# Altium PCB PCB1.PcbDoc
Units mm, origin at the board's own origin, x right, y up, seen from the top; angles counter-clockwise.
Board outline 50 x 50 mm, 2 copper layers (Top Layer, Bottom Layer); 9 components, 6 nets, 36 pads, 4 vias.
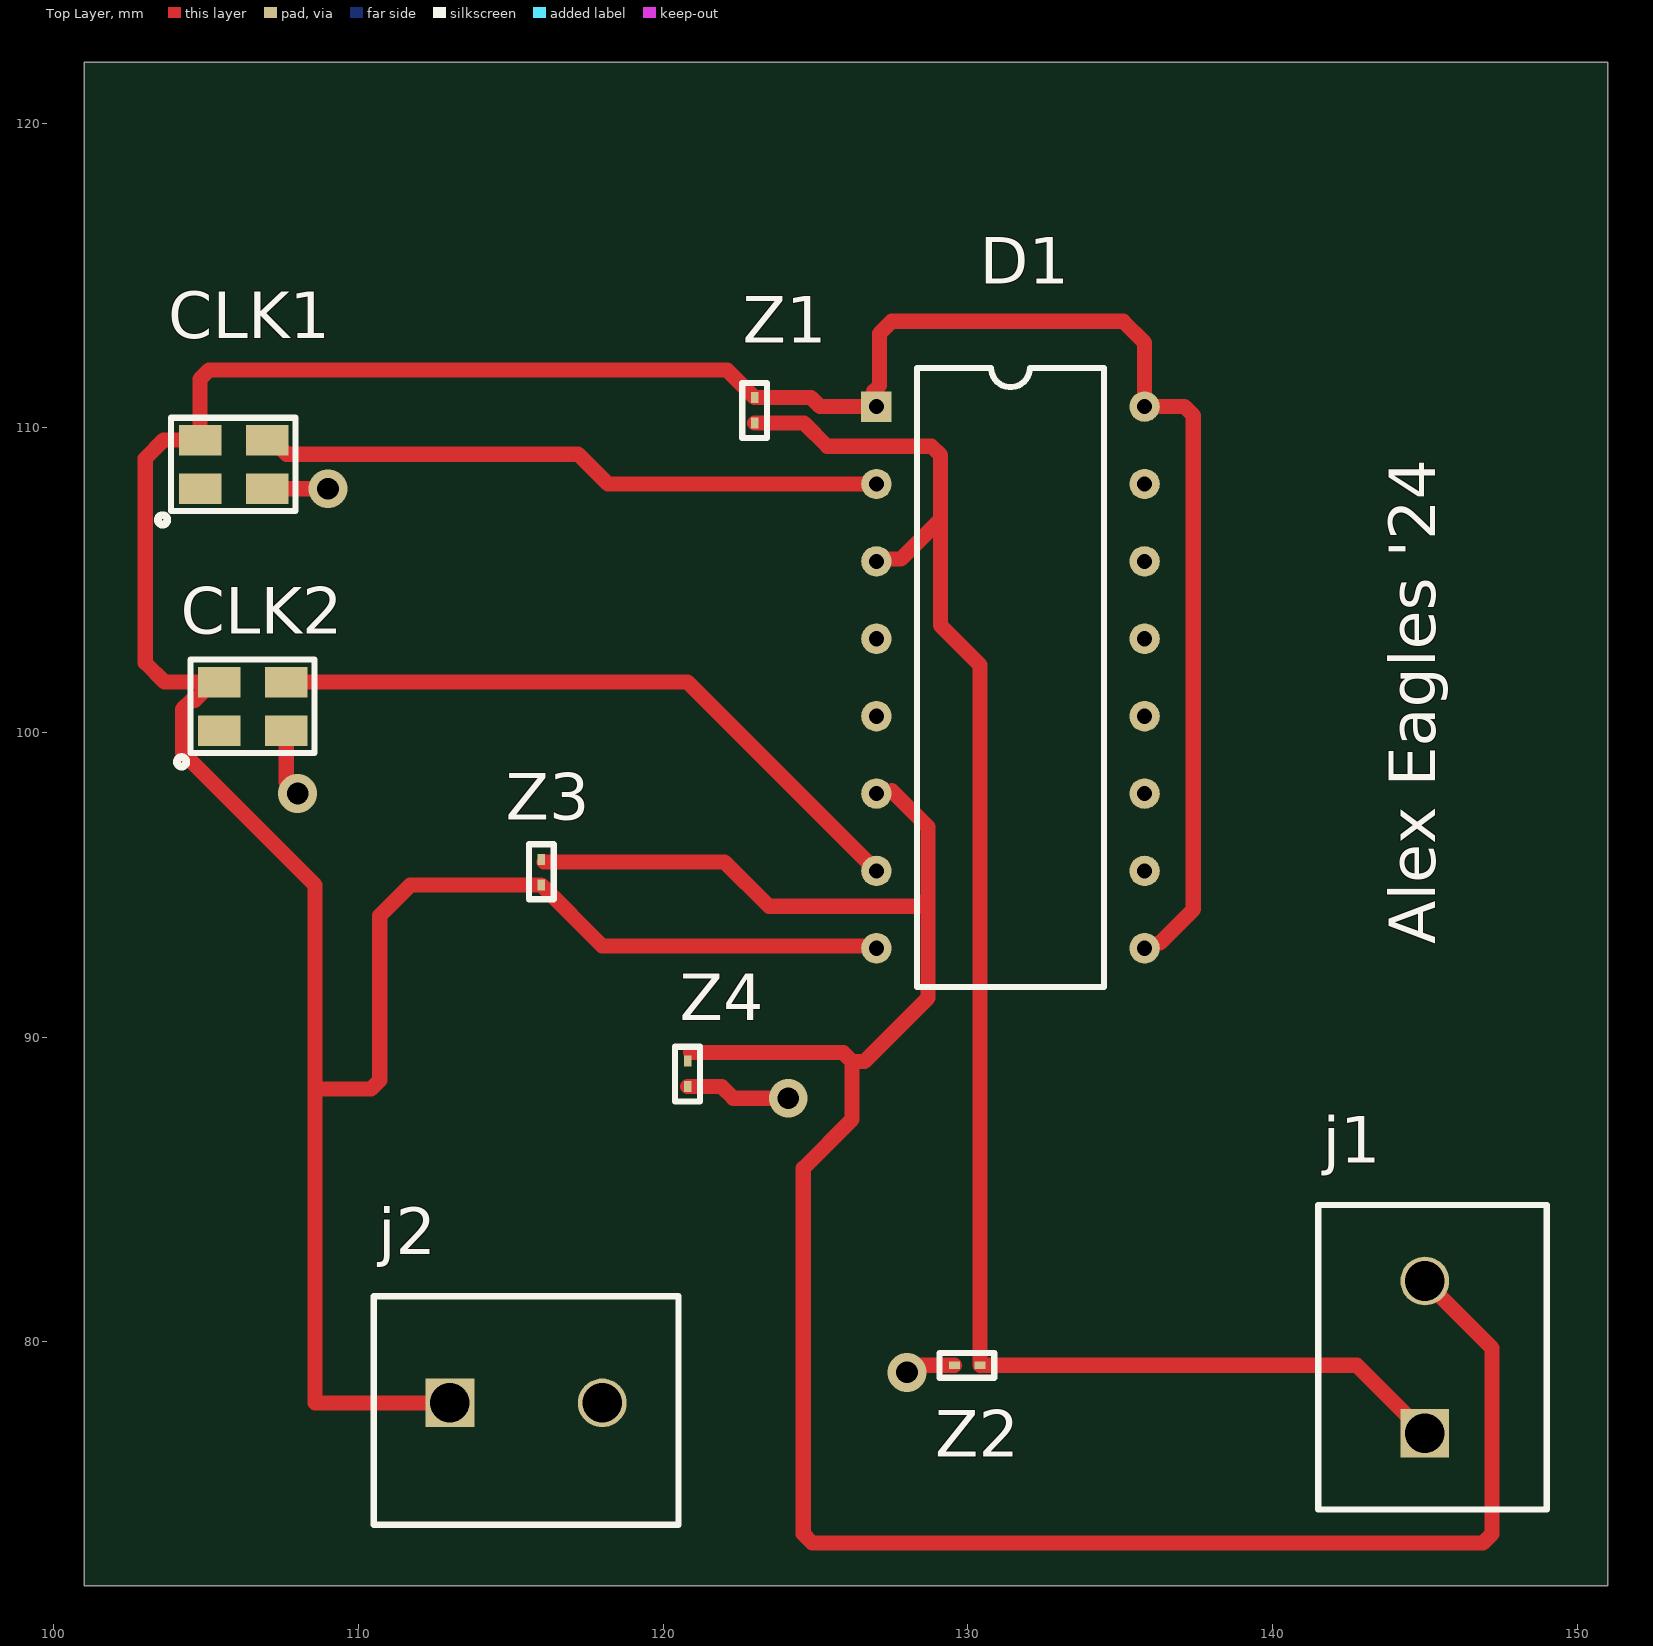
[diagram p0: Top Layer view]
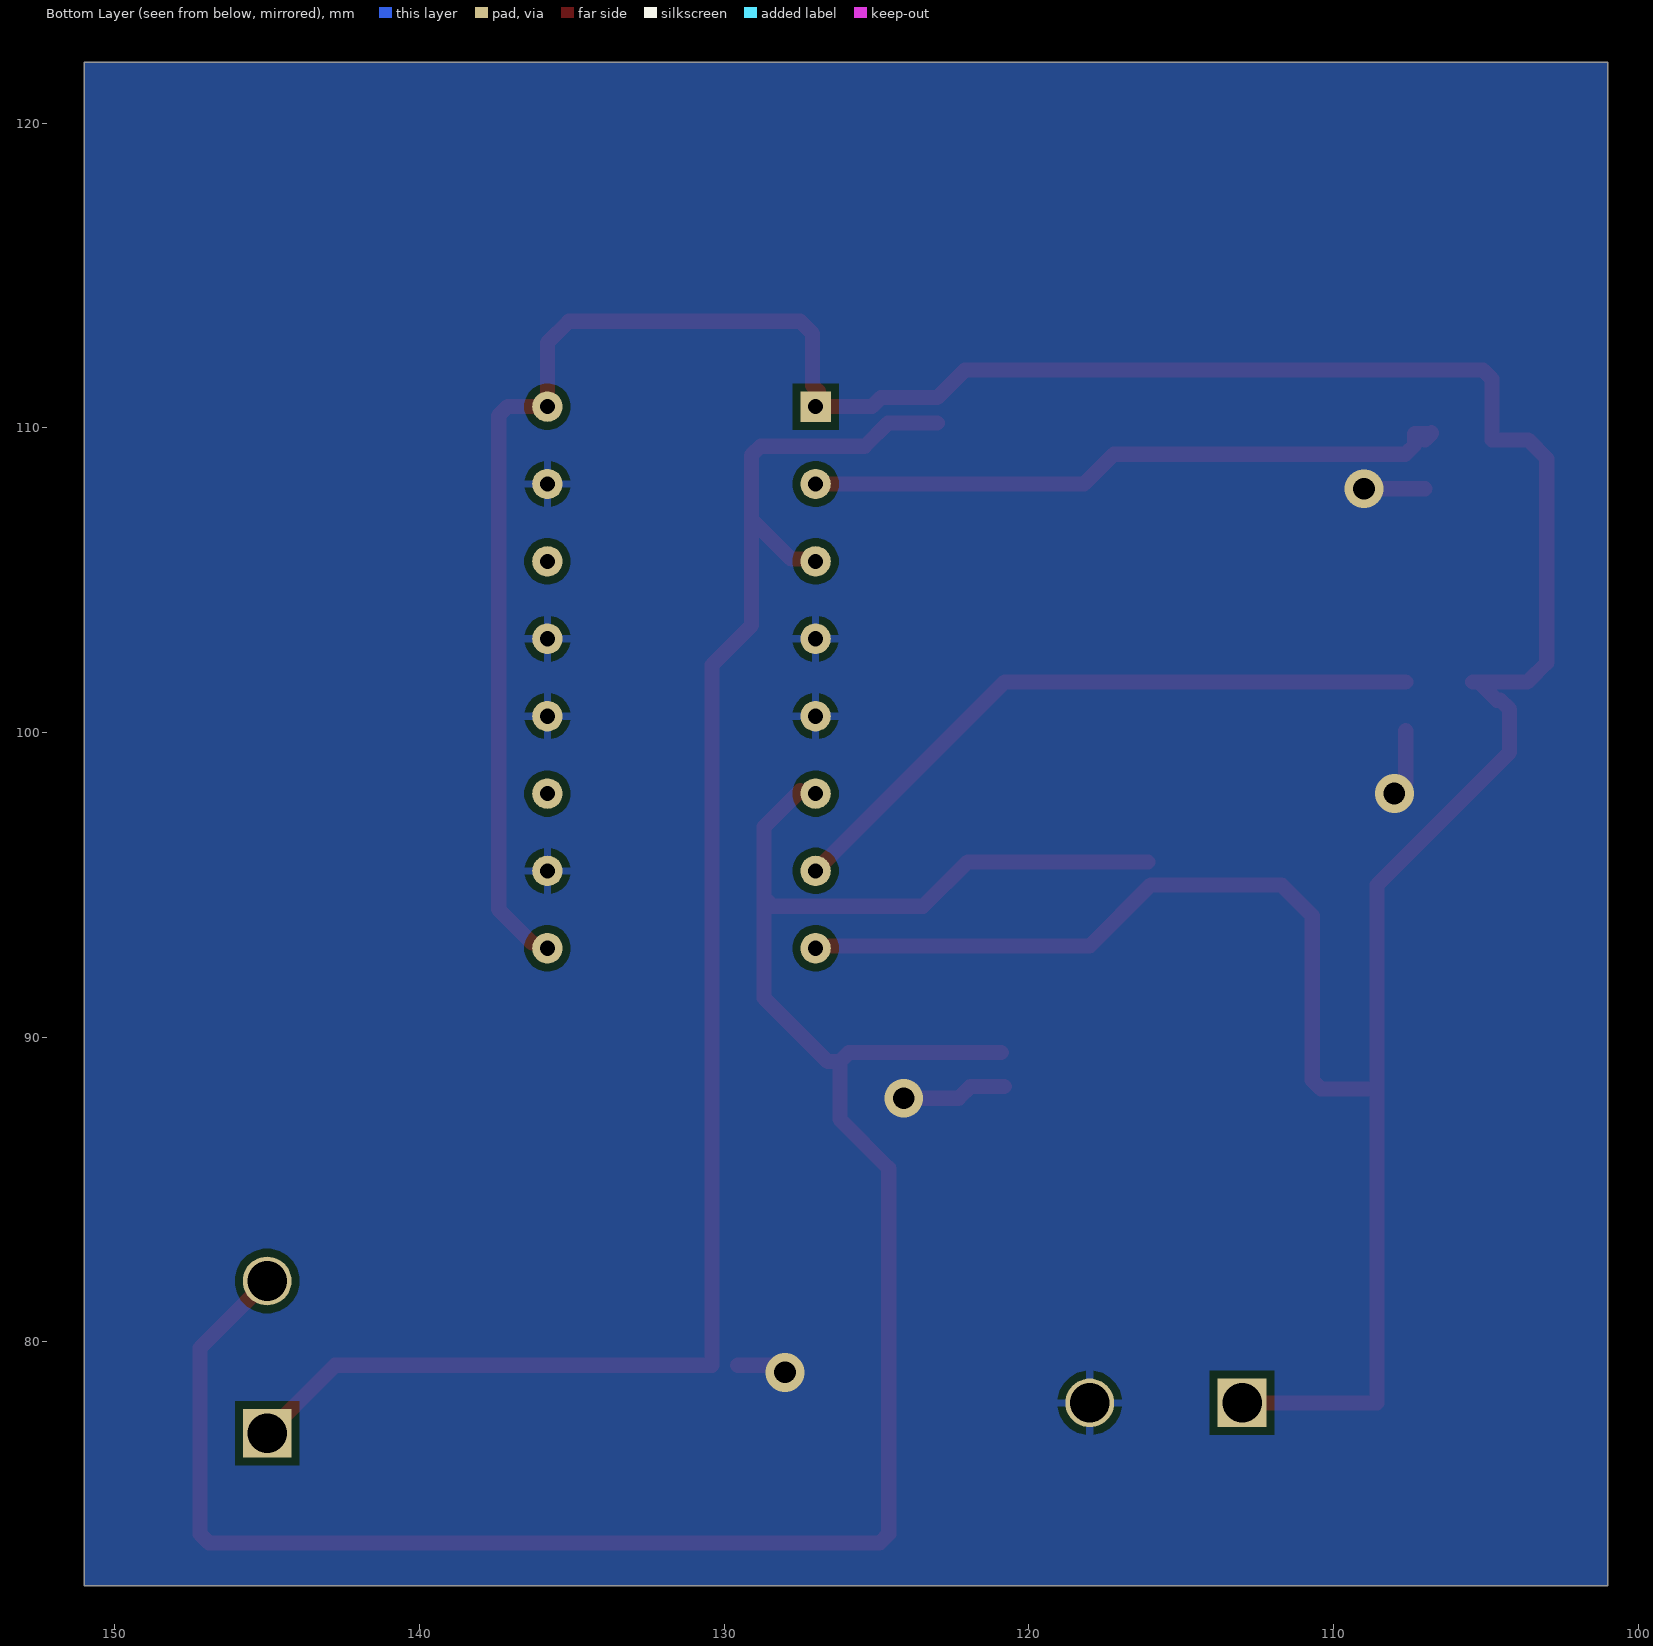
[diagram p1: Bottom Layer view, seen from below]
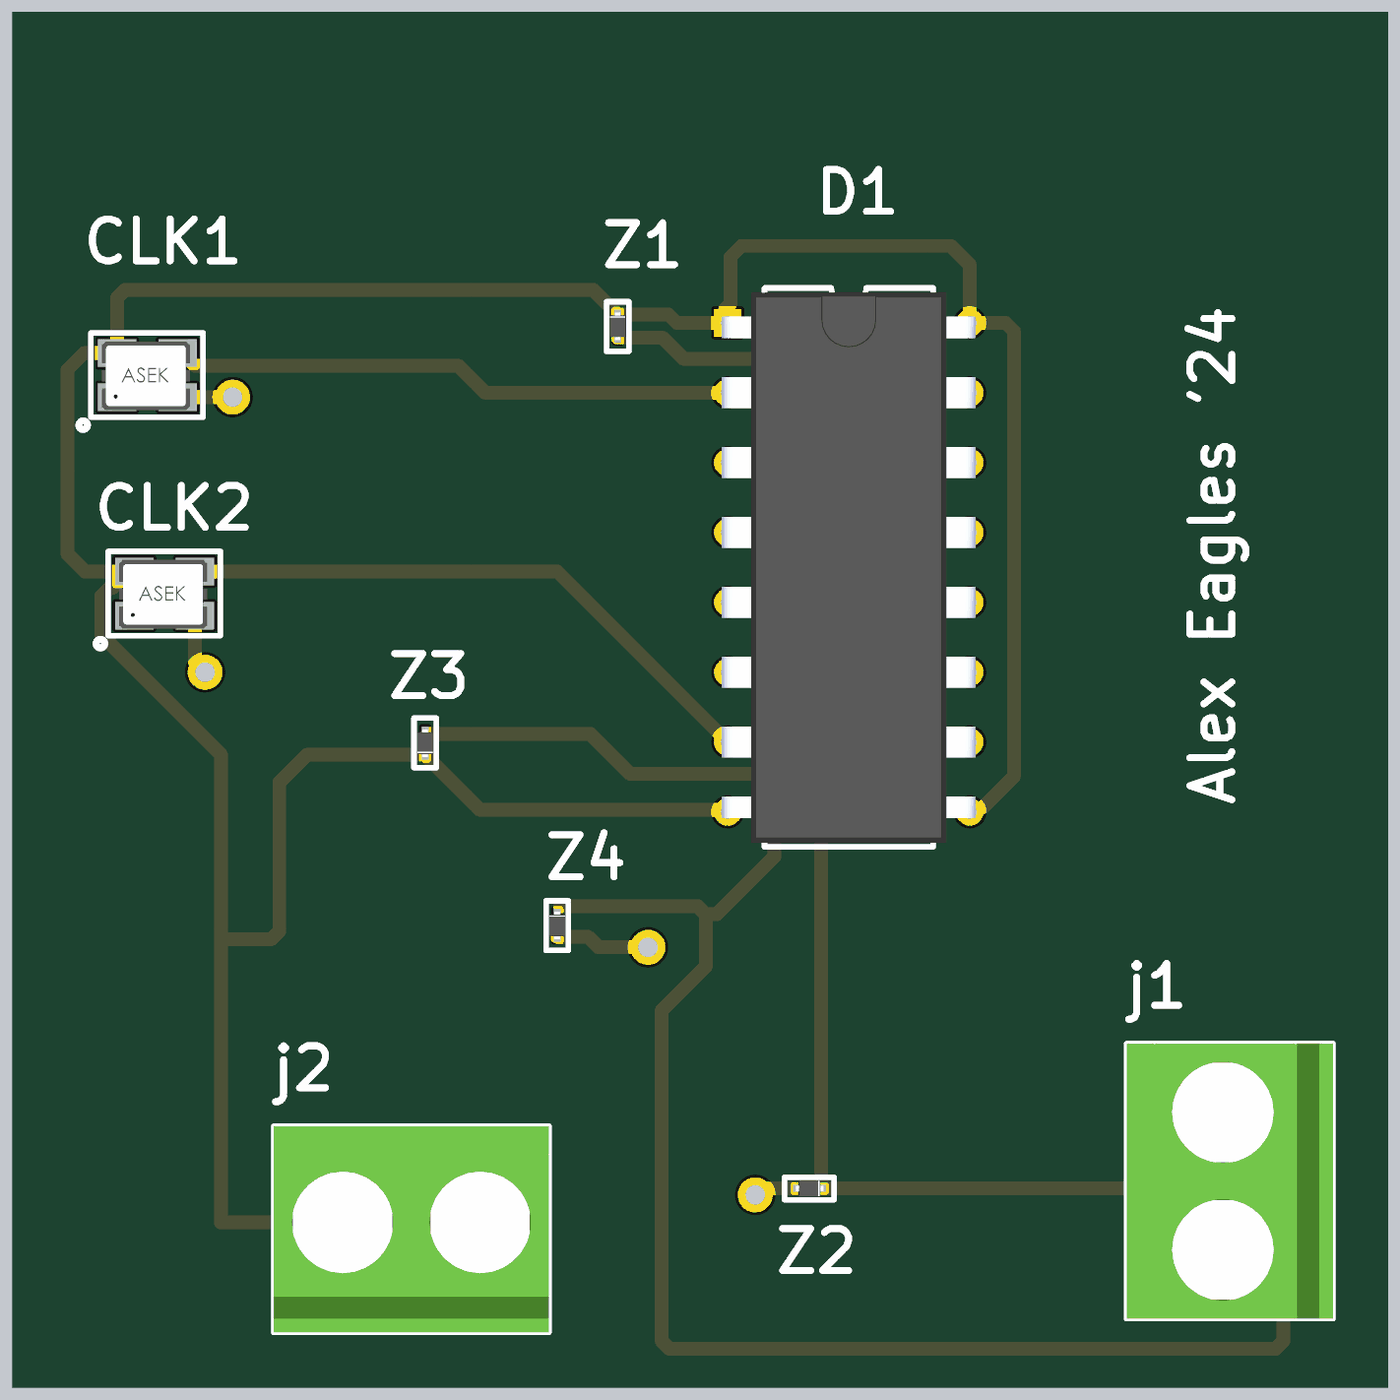
[diagram p2: 3D render of the assembled board from above, using the file's embedded part models]

## Layer stack, top to bottom
Top Solder: solder mask 0.0102, Solder Resist, Dk 3.5
Top Layer: signal copper 0.0356
Dielectric 1: dielectric 0.32, FR-4, Dk 4.8
Bottom Layer: signal copper 0.0356
Bottom Solder: solder mask 0.0102, Solder Resist, Dk 3.5

## Board outline
101,122 151,122 151,72 101,72

## Design rules (kind name [scope] priority, off if disabled: settings)
Clearance [All] p1: gap=0.254 ignorepadtopadclearanceinfootprint=FALSE except(0: Arc-Hole Track-Hole SMDPad-Hole THPad-Hole Via-Hole Fill-Hole Poly-Hole Region-Hole Text-Hole)
PolygonConnect [All] p1: connectstyle=Relief reliefconductorwidth=0.254 reliefentries=4 polygonreliefangle="90 Angle" airgapwidth=0.254
RoutingVias [All] p1: holewidth=0.711 width=1.27 viastyle="Through Hole" minholewidth=0.711 minwidth=1.27 maxholewidth=0.711 maxwidth=1.27
SolderMaskExpansion [All] p1: expansion=0.102 istentingtop=FALSE
Width [All] p1: maxlimit=0.5 minlimit=0.5 preferedwidth=0.5 minimp=50.000000 maximp=50.000000 favimp=50.000000
30 further rules are at their usual default settings.

## Components (designator, comment, footprint, x,y, rotation, side; value= is the part's Value field where it differs from the comment)
CLK1 "crystal clock" "Crystal Oscillator" 104.339,109.927 r0 top
CLK2 "crystal clock" "Crystal Oscillator" 104.966,101.986 r0 top
D1 "L293D Driver" Driver 131.4,101.81 r0 top
j1 "terminal" TERMINAL 145,77 r90 top
j2 "terminal" TERMINAL 113,78 r0 top
Z1 "Zener" Zener 123,110.58 r270 top
Z2 "Zener" Zener 129.977,79.231 r180 top
Z3 "Zener" Zener 116,95.42 r90 top
Z4 "Zener" Zener 120.8,88.8 r270 top

## Footprints (in the part's own frame and the unit in brackets; to place one, negate y for a bottom-side part, rotate by r counter-clockwise, add the part's x,y. Pads: shape width x height; smd on the part's side, far side on the other; paste and mask are expansions set on the pad)
"Crystal Oscillator" [mm]
  rect 1.4x1 smd: 1(0.461,-1.927) 2(2.661,-1.927) 3(2.661,-0.327) 4(0.461,-0.327)
  silkscreen extent -0.93,-3.1 3.59,0.41, body extent -0.09,-2.4 3.11,0.1, height 1.2
Driver [mm]
  rect 1x1 hole 0.5: 1(-4.4,8.89)
  round 1 hole 0.5: 2(-4.4,6.35) 3(-4.4,3.81) 4(-4.4,1.27) 5(-4.4,-1.27) 6(-4.4,-3.81) 7(-4.4,-6.35) 8(-4.4,-8.89) 9(4.4,-8.89) 10(4.4,-6.35) 11(4.4,-3.81) 12(4.4,-1.27) 13(4.4,1.27) 14(4.4,3.81) 15(4.4,6.35) 16(4.4,8.89)
  silkscreen extent -3.07,-10.16 3.07,10.16, body extent -4.62,-10 4.62,10, height 5.1
TERMINAL [mm]
  rect 1.6x1.6 hole 1.3: 1(0,0)
  round 1.6 hole 1.3: 2(5,0)
  silkscreen extent -2.5,-4 7.5,3.5, body extent -2.5,-4 7.5,3.5, height 11.5
Zener [mm]
  rect 0.36x0.25 smd: 1(-0.42,0) 2(0.42,0)
  silkscreen extent -0.89,-0.41 0.91,0.41, body extent -0.5,-0.3 0.5,0.3, height 0.4

## Part data
CLK1 CLK2: library part "Crystal oscillator", "Oscillator XO 0.032768MHz ±25ppm 15pF 60% 3.3V 4-Pin SMD T/R", Manufacturer=Abracon, Manufacturer Part Number=ASEK-32.768KHZ-L-R-T, Supplier Part Number=815-ASEK-32.7K-LRT, Pricing="1=1.33, 10=1.04, 50=1.04, 100=0.986, 1000=0.787, 10000=0.696 (USD)", RoHS=No, Stock=5543, Supplier=Mouser
D1: "IC MTRDRV BIPLR 4.5-36V 16PWRDIP", Part Number=497-2936-5-ND, ComponentLink1Description=DigiKey, ComponentLink1URL=https://www.digikey.com/en/products/detail/stmicroelectronics/L293D/634700
j1 j2: "Barrier Strip Terminal Block", Manufacturer="Wurth Electronics", Manufacturer Part Number=691137710002, Supplier Part Number=1769908, Category="Terminal Blocks", ComponentLink1Description=https://datasheet.ciiva.com:443/pdfs/VipMasterIC/IC/MIDC/MIDC-S-A0005074262/MIDC-S-A0004711666-1.pdf?src-supplier=IHS+Markit, ComponentLink1URL=https://datasheet.ciiva.com:443/pdfs/VipMasterIC/IC/MIDC/MIDC-S-A0005074262/MIDC-S-A0004711666-1.pdf?src-supplier=IHS+Markit, ComponentLink2Description=https://katalog.we-online.de/em/datasheet/691137710002.pdf?src-supplier=Digikey, ComponentLink2URL=https://katalog.we-online.de/em/datasheet/691137710002.pdf?src-supplier=Digikey, Pricing="500=0.218, 1000=0.202, 2500=0.189 (GBP)", RoHS=No, RoHS Compliant=Yes, Stock=355, Supplier=Rs
Z1 Z2 Z3 Z4: "TVS DIODE 5VWM SOD923", Part Number=ESD9B5.0ST5GOSDKR-ND, ComponentLink1Description=DigiKey, ComponentLink1URL=https://www.digikey.com/en/products/detail/onsemi/ESD9B5-0ST5G/1646449

## Via types
v1: diameter 1.27, hole 0.711, Top Layer to Bottom Layer, 4 vias

## Nets (pads, with @x,y where several pads share a name; then routed paths per layer and width w, separated by ;. In a path a pad name is that pad's centre, name@x,y a point inside that pad or via, vN(x,y) a via of type N, cw(c..) or ccw(c..) an arc to the next point about the centre after c; other vN are vias at no path point)
2: CLK1.3 D1.2 | length 21.5
  Top Layer w0.5: CLK1.3 106.782,109.818 106.782,109.85 106.815,109.816 107.34,109.816 107.34,109.432 107.633,109.139 117.207,109.139 118.186,108.16 D1.2
7: CLK2.3 D1.7 | length 21.9
  Top Layer w0.5: CLK2.3 120.801,101.659 D1.7
GND: CLK1.2 CLK2.2 D1.4 D1.5 D1.10 D1.12 D1.13 D1.15 j2.2 Z2.2 Z4.2 | length 9.1
  Top Layer w0.5: CLK1.2 v1(109,108) ; CLK2.2 107.627,98.373 v1(108,98) ; Z4.2 121.92,88.38 122.3,88 v1@123.9,88 ; v1(128,79) 128.231,79.231 Z2.2
  other v1: 124.1,88
V3: D1.3 j1.1 Z1.2 Z2.1 | length 55.1
  Top Layer w0.5: Z1.2 124.624,110.16 125.384,109.4 128.807,109.4 129.1,109.107 129.1,107 ; D1.3@127,105.7 127.8,105.7 129.1,107 ; j1.1 142.769,79.231 Z2.1 130.397,102.223 129.1,103.52 129.1,107
V6: D1.6 j1.2 Z3.2 Z4.1 | length 77.9
  Top Layer w0.5: Z3.2@116.086,95.754 122.016,95.754 123.47,94.3 128.4,94.3 128.693,94.593 ; 120.9,89.5 125.907,89.5 126.2,89.207 ; 127.5,98.1 128.693,96.907 128.693,94.593 ; j1.2@144.702,82 j1.2 147.2,79.8 147.2,73.693 146.907,73.4 124.893,73.4 124.6,73.693 124.6,85.7 126.2,87.3 126.2,89.207 ; 126.2,89.207 126.607,89.207 128.693,91.293 128.693,94.593
VCC: CLK1.4 CLK2.4 D1.1 D1.8 D1.9 D1.16 j2.1 Z1.1 Z3.1 | length 124.6
  Top Layer w0.5: CLK2.4 CLK2.4@105.227,101.659 ; j2.1 108.573,78 108.573,88.3 ; 126.911,111.204 127.1,111.393 127.1,113.1 127.5,113.5 135.1,113.5 135.8,112.8 D1.16 137.107,110.7 137.4,110.407 137.4,94.2 136.3,93.1 ; D1.1@126.955,110.745 D1.1 125.15,110.7 124.85,111 Z1.1 122.1,111.9 105.093,111.9 104.8,111.607 CLK1.4 103.6,109.6 103,109 103,102.293 103.634,101.659 CLK2.4@105.227,101.659 ; D1.8 126.92,93 118,93 Z3.1 111.7,95 110.7,94 110.7,88.593 110.407,88.3 108.573,88.3 ; CLK2.4@105.227,101.659 104.631,101.063 104.518,101.063 104.223,100.768 104.223,99.35 108.573,95 108.573,88.3
pads on no net: CLK1.1 CLK2.1 D1.11 D1.14

## Polygon pours and split planes (outlines as drawn)
GND on Bottom Layer "GND_L02_P000" (solid, pour order 0): 151,122 101,122 101,72 151,72

## Silkscreen, mask and mechanical layers (free items; w line width, h text height)
Top Overlay:
  text "Alex Eagles '24" at 145.338,93.054 h1.52 r90